# Altium PCB RFID_PLAYER.PcbDoc
Units mil, origin at the board's own origin, x right, y up, seen from the top; angles counter-clockwise.
Board outline 2365 x 1575 mil, 2 copper layers (Top Layer, Bottom Layer); 28 components, 28 nets, 118 pads, 8 vias.
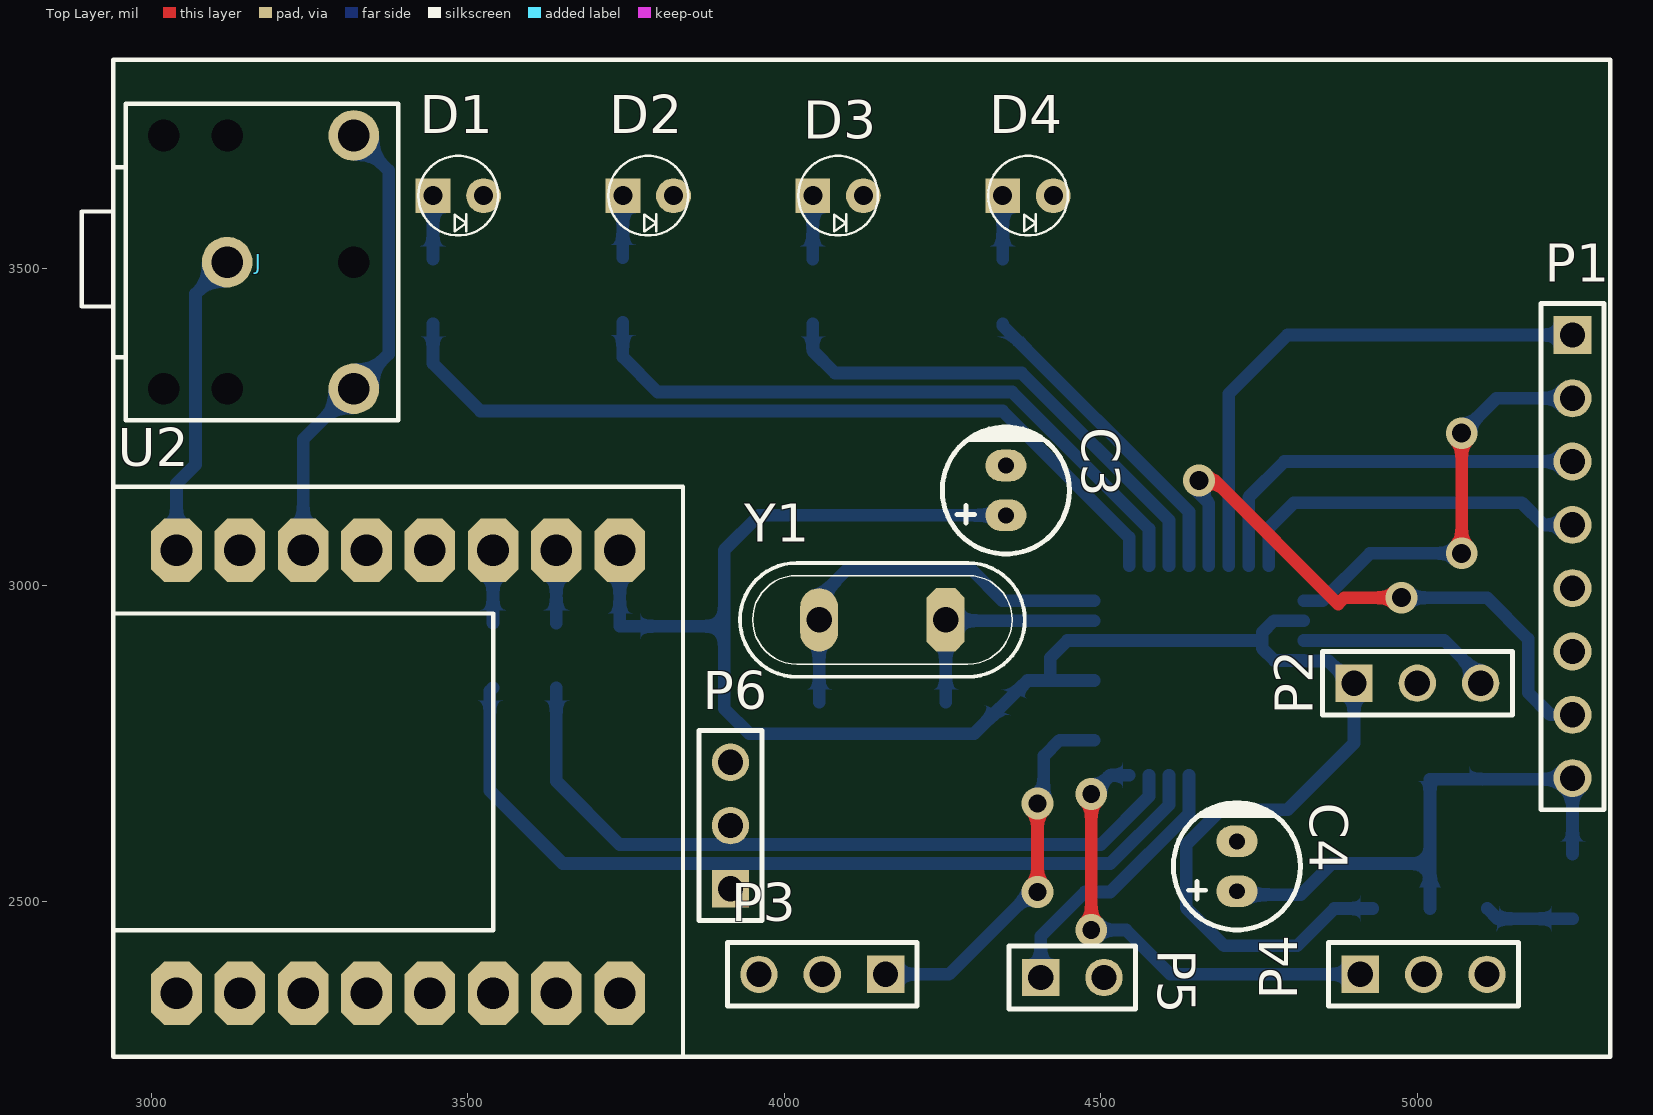
[diagram p0: Top Layer view]
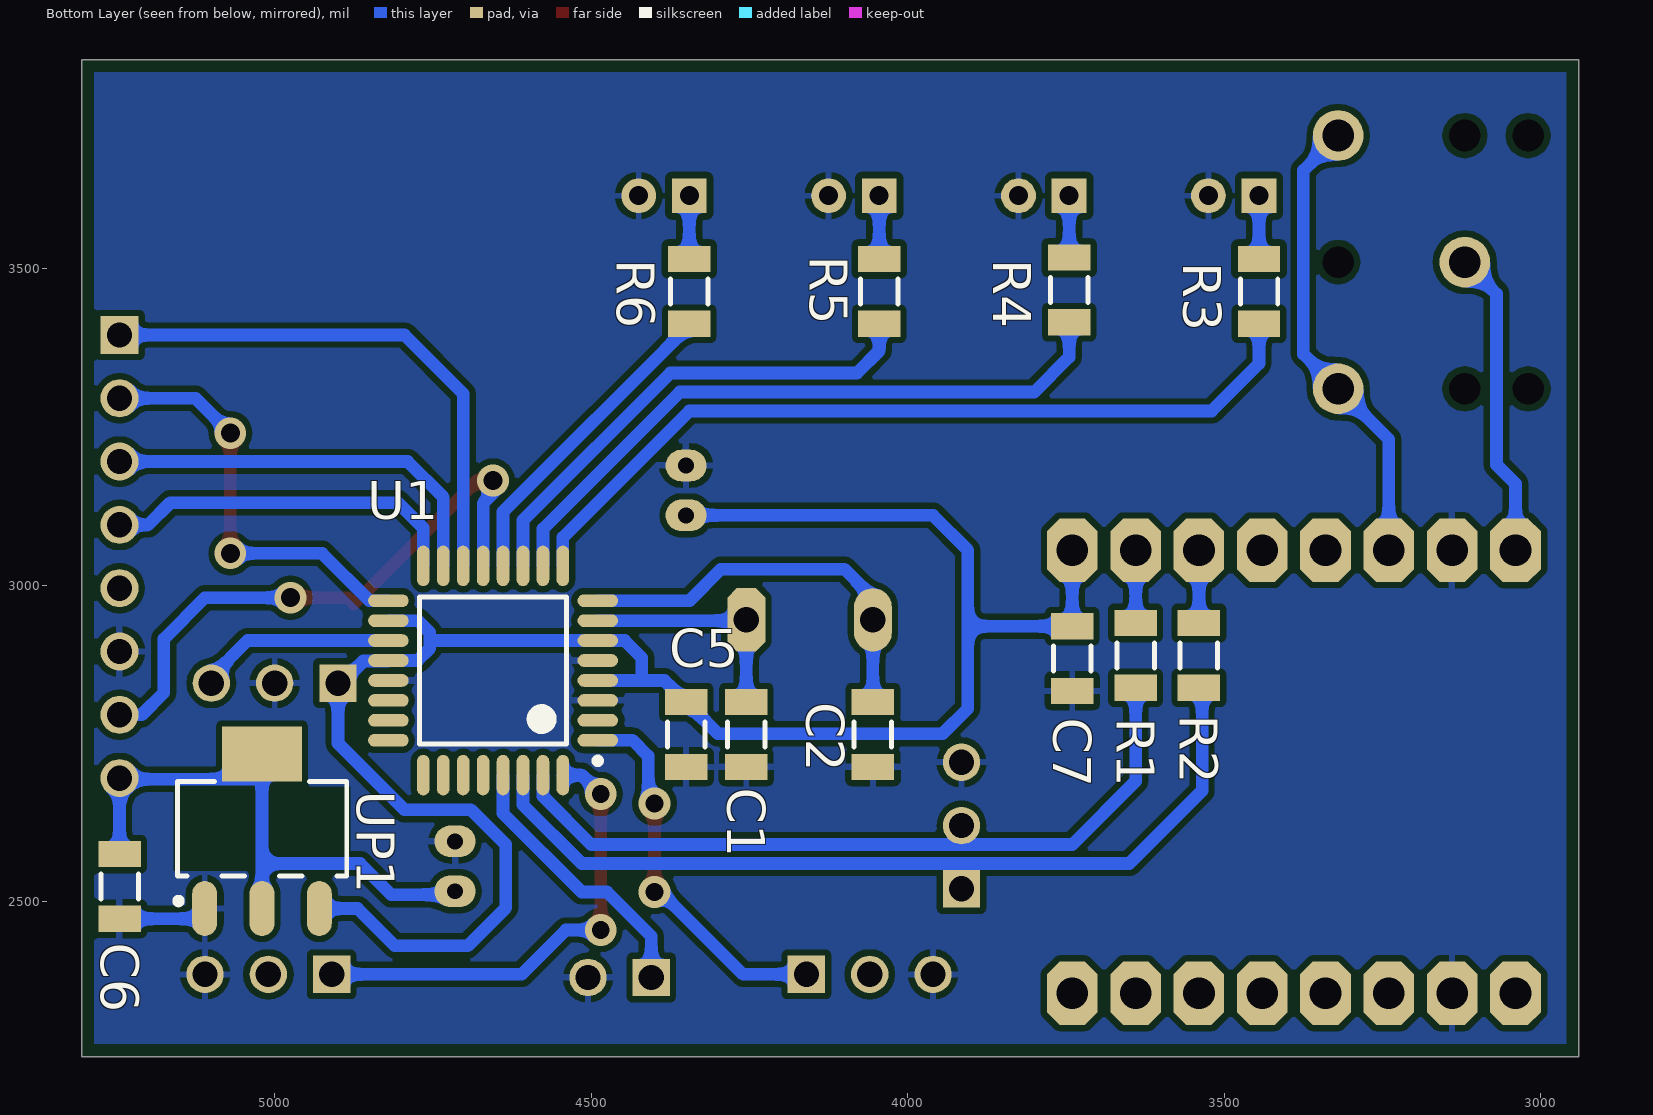
[diagram p1: Bottom Layer view, seen from below]
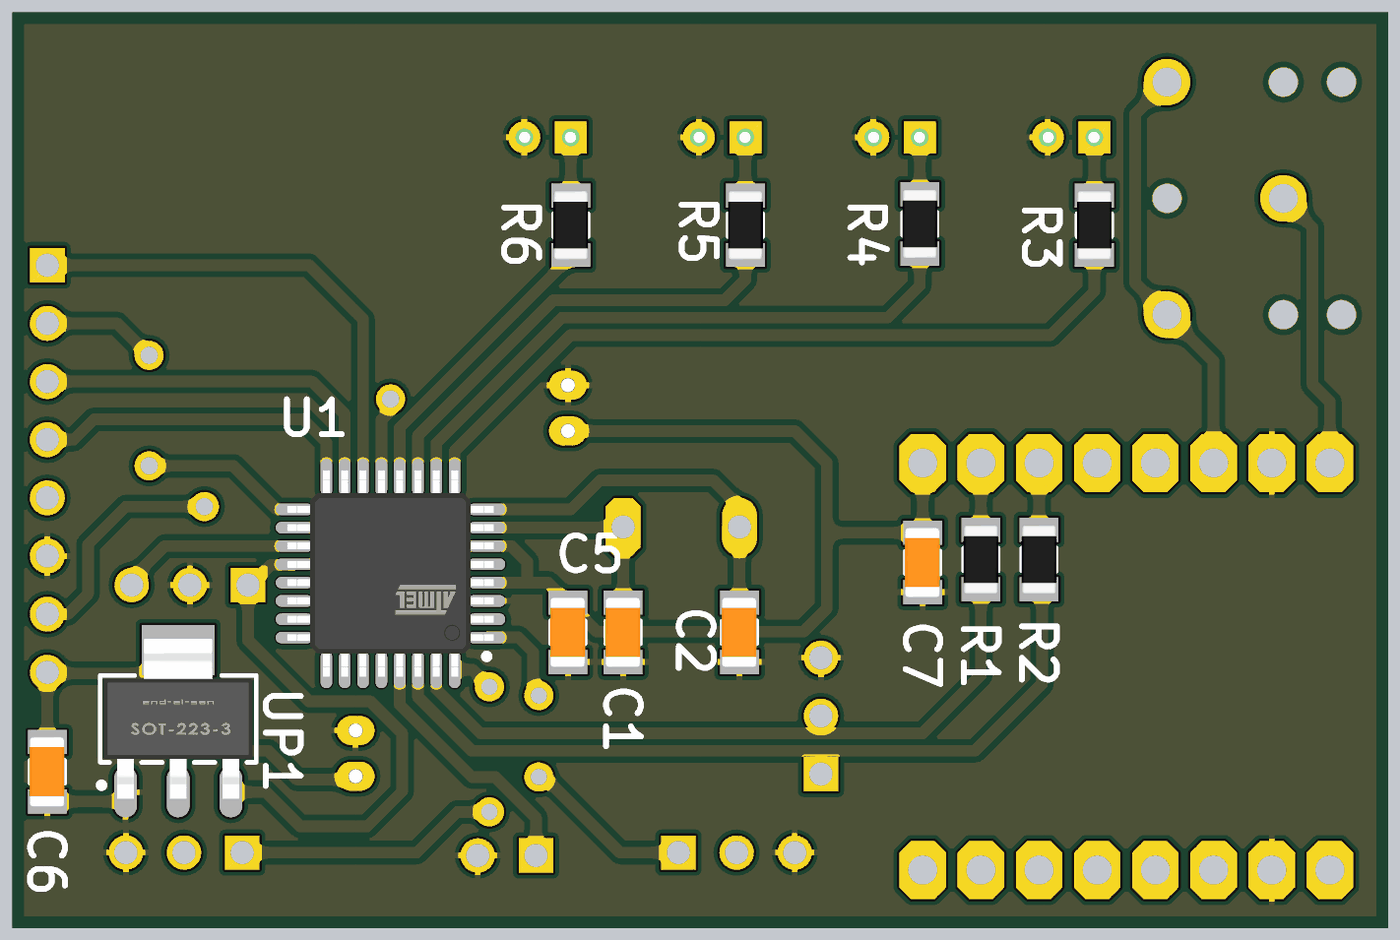
[diagram p2: 3D render of the assembled board from below, using the file's embedded part models]

## Layer stack, top to bottom
Top Solder: solder mask 0.4, Solder Resist, Dk 3.5
Top Layer: signal copper 1.4
Dielectric 1: dielectric 12.6, FR-4, Dk 4.8
Bottom Layer: signal copper 1.4
Bottom Solder: solder mask 0.4, Solder Resist, Dk 3.5

## Board outline
2940,2255 2940,3830 5305,3830 5305,2255

## Design rules (kind name [scope] priority, off if disabled: settings)
Clearance [All] p1: gap=10 ignorepadtopadclearanceinfootprint=FALSE except(0: Arc-Hole Track-Hole SMDPad-Hole THPad-Hole Via-Hole Fill-Hole Poly-Hole Region-Hole Text-Hole)
PolygonConnect [All] p1: connectstyle=Relief reliefconductorwidth=10 reliefentries=4 polygonreliefangle="90 Angle" airgapwidth=10
RoutingVias [All] p1: holewidth=28 width=50 viastyle="Through Hole" minholewidth=28 minwidth=50 maxholewidth=28 maxwidth=50
SolderMaskExpansion [All] p1: expansion=4 istentingtop=FALSE
Width [All] p1: maxlimit=60 minlimit=10 preferedwidth=20
30 further rules are at their usual default settings.

## Components (designator, comment, footprint, x,y, rotation, side; value= is the part's Value field where it differs from the comment)
C1 "22pF" SMD_CAP_1206 4255,2815 r270 bottom
C2 "22pF" SMD_CAP_1206 4055,2815 r270 bottom
C3 "1uF" "cap 01" 4350,3149.37 r270 top
C4 "1uF" "cap 01" 4715,2555.63 r270 top
C5 "100nF" SMD_CAP_1206 4350,2815 r270 bottom
C6 "100nF" SMD_CAP_1206 5245,2575 r270 bottom
C7 "100nF" SMD_CAP_1206 3740,2935 r270 bottom
D1 "LED3MM" LED3mm_GRN 3485,3615 r0 top
D2 "LED3MM" LED3mm_GRN 3785,3615 r0 top
D3 "LED3MM" LED3mm_GRN 4085,3615 r0 top
D4 "LED3MM" LED3mm_GRN 4385,3615 r0 top
J "Audio" PCBComponent_1#1 3320,3010 r90 top
P1 "Header 8" HDR1X8 5245,3395 r270 top
P2 "Header 3" HDR1X3 4900,2845 r0 top
P3 "Header 3" HDR1X3 4160,2385 r180 top
P4 "Header 3" HDR1X3 4910,2385 r0 top
P5 "Header 2" HDR1X2 4405,2380 r0 top
P6 "Header 3" HDR1X3 3915,2520 r90 top
R1 "10K" "RES 1206 (3216X08L)" 3640,2837.8 r90 bottom
R2 "10K" "RES 1206 (3216X08L)" 3540,2837.8 r90 bottom
R3 "300" "RES 1206 (3216X08L)" 3445,3515 r270 bottom
R4 "300" "RES 1206 (3216X08L)" 3745,3517.2 r270 bottom
R5 "300" "RES 1206 (3216X08L)" 4045,3515 r270 bottom
R6 "300" "RES 1206 (3216X08L)" 4345,3412.8 r90 bottom
U1 "ATmega8L-8AI" 32A_N 4655,2865 r0 bottom
U2 "DF_PLAYER" PCBComponent_1#2 3940,3155 r270 top
UP1 "3V3" SOT223 5020,2615 r90 bottom
Y1 "16MHZ" My_Crystal 4155,2945 r180 top

## Footprints (in the part's own frame and the unit in brackets; to place one, negate y for a bottom-side part, rotate by r counter-clockwise, add the part's x,y. Pads: shape width x height; smd on the part's side, far side on the other; paste and mask are expansions set on the pad)
32A_N [mil] "Thin QFP, 32-Leads, Body 7x7mm, Pitch 0.8mm, IPC Medium Density"
  oval 64x20 smd mask+2.36: 1(-165.35,110.24) 2(-165.35,78.74) 3(-165.35,47.24) 4(-165.35,15.75) 5(-165.35,-15.75) 6(-165.35,-47.24) 7(-165.35,-78.74) 8(-165.35,-110.24) 17(165.35,-110.24) 18(165.35,-78.74) 19(165.35,-47.24) 20(165.35,-15.75) 21(165.35,15.75) 22(165.35,47.24) 23(165.35,78.74) 24(165.35,110.24)
  oval 20x64 smd mask+2.36: 9(-110.24,-165.35) 10(-78.74,-165.35) 11(-47.24,-165.35) 12(-15.75,-165.35) 13(15.75,-165.35) 14(47.24,-165.35) 15(78.74,-165.35) 16(110.24,-165.35) 25(110.24,165.35) 26(78.74,165.35) 27(47.24,165.35) 28(15.75,165.35) 29(-15.75,165.35) 30(-47.24,165.35) 31(-78.74,165.35) 32(-110.24,165.35)
  silkscreen extent -170,-116 116,148, body extent -177,-177 177,177, height 45
"cap 01" [mil]
  oval 50x65 hole 25: 1(39.37,0) 2(-39.37,0)
  silkscreen extent -100,-100 100,100, body extent -99,-99 99,99, height 494
HDR1X2 [mm] "Connector; Header; 2 Position"
  rect 1.5x1.5 hole 1.016: 1(0,0)
  round 1.5 hole 1.016: 2(2.54,0)
  silkscreen extent -1.27,-1.27 3.81,1.27
HDR1X3 [mm] "Connector; Header; 3 Position"
  rect 1.5x1.5 hole 1.016: 1(0,0)
  round 1.5 hole 1.016: 2(2.54,0) 3(5.08,0)
  silkscreen extent -1.27,-1.27 6.35,1.27
HDR1X8 [mil] "Connector; Header; 8 Position"
  rect 60x60 hole 40: 1(0,0)
  round 60 hole 40: 2(100,0) 3(200,0) 4(300,0) 5(400,0) 6(500,0) 7(600,0) 8(700,0)
  silkscreen extent -50,-50 750,50
LED3mm_GRN [mil]
  rect 55x55 hole 30: 1(-40,0)
  round 55 hole 30: 2(40,0)
  silkscreen extent -63,-63 63,63, body extent -69,-69 69,69, height 154
My_Crystal [mil]
  oct 60x100 hole 40: 1(-100,0)
  oval 60x100 hole 40: 2(100,0)
  silkscreen extent -225,-90 225,90
PCBComponent_1#1 [mil]
  round 80 hole 50: 1(300,0) 2(500,200) 3(700,0)
  oct 0x0 hole 50: 4(500,0) 5(700,200) 6(700,300) 7(300,200) 8(300,300)
  silkscreen extent 250,-70 750,430
PCBComponent_1#2 [mil]
  oct 100x80 hole 50: 1(100,-200) 2(100,-300) 3(100,-400) 4(100,-500) 5(100,-600) 6(100,-700) 7(100,-800) 8(100,-900) 9(800,-900) 10(800,-800) 11(800,-700) 12(800,-600) 13(800,-500) 14(800,-400) 15(800,-300) 16(800,-200)
  silkscreen extent 0,-1000 900,-100
"RES 1206 (3216X08L)" [mm] "Chip Resistor, 2-Leads, Body 3.2x1.6mm, IPC High Density _ (0.125 W)"
  rect 1.05x1.7 smd: 1(0,0) 2(2.596,0)
  silkscreen extent 0.8,-0.75 1.8,0.75, body extent -0.23,-0.76 2.82,0.76, height 0.6
SMD_CAP_1206 [mm]
  rect 1.05x1.7 smd: 1(0,0) 2(2.596,0)
  silkscreen extent 0.8,-0.75 1.8,0.75, body extent -0.22,-0.77 2.82,0.75, height 0.75
SOT223 [mm] "SOT223, 4-Leads, Body 6.5x3.5mm, Pitch 2.30mm-Designer Abbas Basereh"
  oval 2.2x1 smd: 1(-3.2,2.3) 2(-3.2,0) 3(-3.2,-2.3)
  rect 2.2x3.2 smd: 4(3,0)
  Top Layer pour cut-out: -1.7,3.556 1.7,3.556 1.7,-3.556 -1.7,-3.556
  silkscreen extent -3.02,-3.4 1.9,3.48, body extent -3.5,-3.25 3.5,3.25, height 1.7

## Part data
C1 C2 C5 C6 C7: library part Cap-Bipolar, "Bipolar Capacitor", Voltage=100V, Adding Date=1387/12/20, Designer="Saeid Jorablo", Organazation=ControTec
C3 C4: library part Cap-Polar, "Polar Capacitor", Voltage=16V, Adding Date=1387/12/20, Designer="Saeid Jorablo", Organazation=ControTec
D1 D2 D3 D4: library part "LED 3MM", "Light Emitting Diode", Designer="Ali Hafizi"
J: library part 3.5mm_Audio
P1: "Header, 8-Pin", LatestRevisionDate=17-Jul-2002, LatestRevisionNote="Re-released for DXP Platform.", Publisher="Altium Limited"
P2 P3 P4 P6: "Header, 3-Pin", LatestRevisionDate=17-Jul-2002, LatestRevisionNote="Re-released for DXP Platform.", Publisher="Altium Limited"
P5: "Header, 2-Pin", LatestRevisionDate=17-Jul-2002, LatestRevisionNote="Re-released for DXP Platform.", Publisher="Altium Limited"
R1 R2 R3 R4 R5 R6: library part Resistor, "Resistor"
U1: "8-Bit AVR Microcontroller with 8K Bytes of In-System Programmable Flash Memory", Supplier Part Number 1=ATMEGA8L-8AI-ND, Code_JEDEC=MS-026-ABA, ComponentLink1Description=Datasheet, ComponentLink1URL=http://www.atmel.com/dyn/resources/prod_documents/doc2486.pdf, ComponentLink2Description="Atmel.com Home", ComponentLink2URL=http://www.atmel.com, DatasheetVersion=2486H-AVR-09/02, LatestRevisionDate=16-Oct-2006, LatestRevisionNote="IPC-7351 Footprint Added.", PackageDescription="32-Lead, 7x7x1.0 mm Body, 0.8mm Lead Pitch, Thin Profile Plastic Quad Flat Package (TQFP)", PackageReference=32A, PackageVersion=2017-1-4, Published=2017-1-4, Publisher="Abbas Basereh", Supplier 1=Digi-Key, Supplier 2=Farnell, Supplier 3=Mouser, Supplier Part Number 2=3917952, Supplier Part Number 3=556-ATMEGA8L-8AI
UP1: library part AMS1117-x.x, "x.x Volt, 800mA Low-Dropout Linear Regulator, 4-pin SOT-223", Data=16-12-2016, Designer="Ali Hafizi"
Y1: library part CRYSTAL, "Crystal"

## Via types
v1: diameter 50, hole 30, Top Layer to Bottom Layer, 4 vias
v2: diameter 50, hole 28, Top Layer to Bottom Layer, 4 vias

## Nets (pads, with @x,y where several pads share a name; then routed paths per layer and width w, separated by ;. In a path a pad name is that pad's centre, name@x,y a point inside that pad or via, vN(x,y) a via of type N, cw(c..) or ccw(c..) an arc to the next point about the centre after c; other vN are vias at no path point)
3.3V: C4.1 C6.1 P1.8 UP1.2 UP1.4 | length 895.3
  Bottom Layer w20: C4.1@4695,2510.63 4815.63,2510.63 4865,2560 5020,2560 ; UP1.2 5020,2693.11 5243.11,2693.11 P1.8 C6.1
GND: C1.2 C2.2 C3.2 C4.2 C5.2 C6.2 C7.2 D1.2 D2.2 D3.2 D4.2 P1.6 P2.2 P3.3 P4.3 P5.2 P6.3 U1.3 U1.5 U1.21 U2.7 U2.10 UP1.1 | length 141.2
  Bottom Layer w20: UP1.1 5126.77,2472.8 C6.2
MISO: P1.4 U1.16 | length 570.6
  Bottom Layer w20: U1.16 4765.24,3090.24 4805,3130 5165,3130 5200,3095 P1.4
MOSI: P1.3 U1.15 | length 642.9
  Bottom Layer w20: U1.15 4733.74,3138.74 4790,3195 P1.3
NetC1_1: C1.1 U1.7 Y1.1 | length 369.3
  Bottom Layer w20: C1.1 Y1.1 ; Y1.1@4255,2955 4266.26,2943.74 U1.7
NetC2_1: C2.1 U1.8 Y1.2 | length 628.9
  Bottom Layer w20: C2.1 Y1.2 ; Y1.2@4055,2955 4055,2980 4100,3025 4295,3025 4344.76,2975.24 U1.8
NetD1_1: D1.1 R3.1 | length 100
  Bottom Layer w20: R3.1 D1.1
NetD2_1: D2.1 R4.1 | length 97.8
  Bottom Layer w20: R4.1 D2.1
NetD3_1: D3.1 R5.1 | length 100
  Bottom Layer w20: R5.1 D3.1
NetD4_1: D4.1 R6.2 | length 100
  Bottom Layer w20: R6.2 D4.1
NetJ_1: J.1 J.3 U2.6 | length 733.7
  Bottom Layer w20: U2.6 3240,3230 J.1 3375,3365 3375,3655 J.3
NetJ_2: J.2 U2.8 | length 488.1
  Bottom Layer w20: U2.8 3040,3160 3070,3190 3070,3460 J.2
NetR1_2: R1.2 U2.2 | length 115
  Bottom Layer w20: R1.2 U2.2
NetR2_2: R2.2 U2.3 | length 115
  Bottom Layer w20: R2.2 U2.3
NetR3_2: R3.2 U1.9 | length 1321.3
  Bottom Layer w20: R3.2 3445,3350 3520,3275 4345,3275 4544.76,3075.24 U1.9
NetR4_2: R4.2 U1.10 | length 1057
  Bottom Layer w20: R4.2 3745,3360 3800,3305 4360,3305 4576.26,3088.74 U1.10
NetR5_2: R5.2 U1.11 | length 788.3
  Bottom Layer w20: R5.2 4045,3370 4080,3335 4375,3335 4607.76,3102.24 U1.11
NetR6_1: R6.1 U1.12 | length 504.3
  Bottom Layer w20: R6.1 4345,3410 4639.25,3115.75 U1.12
RESET: P1.7 U1.13 | length 942.5
  Top Layer w20: v1(4655,3165) 4680,3165 4875,2970 4885,2980 v1(4975,2980)
  Bottom Layer w20: v1(4655,3165) 4655,3145 4670.75,3129.25 U1.13 ; v1(4975,2980) 5110,2980 5175,2915 5175,2830 5210,2795 P1.7
RST: P5.1 U1.29 | length 440.1
  Bottom Layer w20: P5.1 4405,2445 4475,2515 4515,2515 4639.25,2639.25 U1.29
RX: P6.2 R1.1 U1.31 | length 1215.5
  Bottom Layer w20: R1.1 3640,2690 3740,2590 3915,2590 ; P6.2@3915,2615 3915,2590 ; U1.31 4576.26,2666.26 4500,2590 3915,2590
SCK: P1.2 U1.17 | length 668.4
  Top Layer w20: v1(5070,3050) v1(5070,3240)
  Bottom Layer w20: U1.17 4850.24,2975.24 4925,3050 v1(5070,3050) ; v1(5070,3240) 5125,3295 P1.2
SS: P1.1 U1.14 | length 853.1
  Bottom Layer w20: U1.14 4702.24,3302.24 4795,3395 P1.1
TX: P6.1 R2.1 U1.30 | length 1415.6
  Bottom Layer w20: R2.1 3535,2832.8 3535,2675 3650,2560 3915,2560 ; P6.1@3915,2515 3915,2560 ; U1.30 4607.76,2652.76 4515,2560 3915,2560
V_DN: P4.1 U1.32 | length 741
  Top Layer w20: v2(4485,2455) v2(4485,2670)
  Bottom Layer w20: v2(4485,2455) 4540,2455 4610,2385 P4.1 ; v2(4485,2670) 4514.65,2699.65 U1.32
V_UP: P3.1 U1.1 | length 607.2
  Top Layer w20: v2(4400,2515) v2(4400,2655)
  Bottom Layer w20: P3.1 4260,2385 4395,2520 v2(4400,2515) ; v2(4400,2655) 4400,2660 4410,2670 4410,2730 4435,2755 4489.41,2755 U1.1
VBAT: P2.3 U1.19 | length 303.4
  Bottom Layer w20: U1.19 5042.76,2912.24 P2.3@5100,2855
VCC: C3.1 C5.1 C7.1 P2.1 U1.4 U1.6 U1.18 U1.20 U2.1 UP1.3 | length 3154.1
  Bottom Layer w20: U2.1 C7.1 3905,2935 ; C3.1 3960,3110 3905,3055 3905,2935 ; 4420,2850 4420,2885 4447.24,2912.24 U1.6 4754.74,2912.24 4755,2912.5 ; U1.4 4384.25,2849.25 4300,2765 3945,2765 3905,2805 3905,2935 ; U1.18 4773.74,2943.74 4755,2925 4755,2912.5 ; P2.1@4890,2850 4860,2880 4821.1,2880 U1.20 4774.25,2880.75 4755,2900 4755,2912.5 ; P2.1@4900,2855 4900,2750 4795,2645 4690,2645 4635,2590 4635,2490 4695,2430 4810,2430 4869.02,2489.02 UP1.3
pads on no net: J.4 J.5 J.6 J.7 J.8 P1.5 P3.2 P4.2 U1.2 U1.22 U1.23 U1.24 U1.25 U1.26 U1.27 U1.28 U2.4 U2.5 U2.9 U2.11 U2.12 U2.13 U2.14 U2.15 U2.16

## Polygon pours and split planes (outlines as drawn)
GND on Bottom Layer "Bottom Layer-GND" (solid, pour order 2): 5285,3810 2960,3810 2960,2275 5285,2275

## Silkscreen, mask and mechanical layers (free items; w line width, h text height)
Top Overlay:
  the board outline again, w7